# Altium PCB LEDCUBE.PcbDoc (part 1 of 2)
Units mm, origin at the board's own origin, x right, y up, seen from the top; angles counter-clockwise.
Board outline 150 x 150 mm, 2 copper layers (Top Layer, Bottom Layer); 119 components, 223 nets, 564 pads, 151 vias.
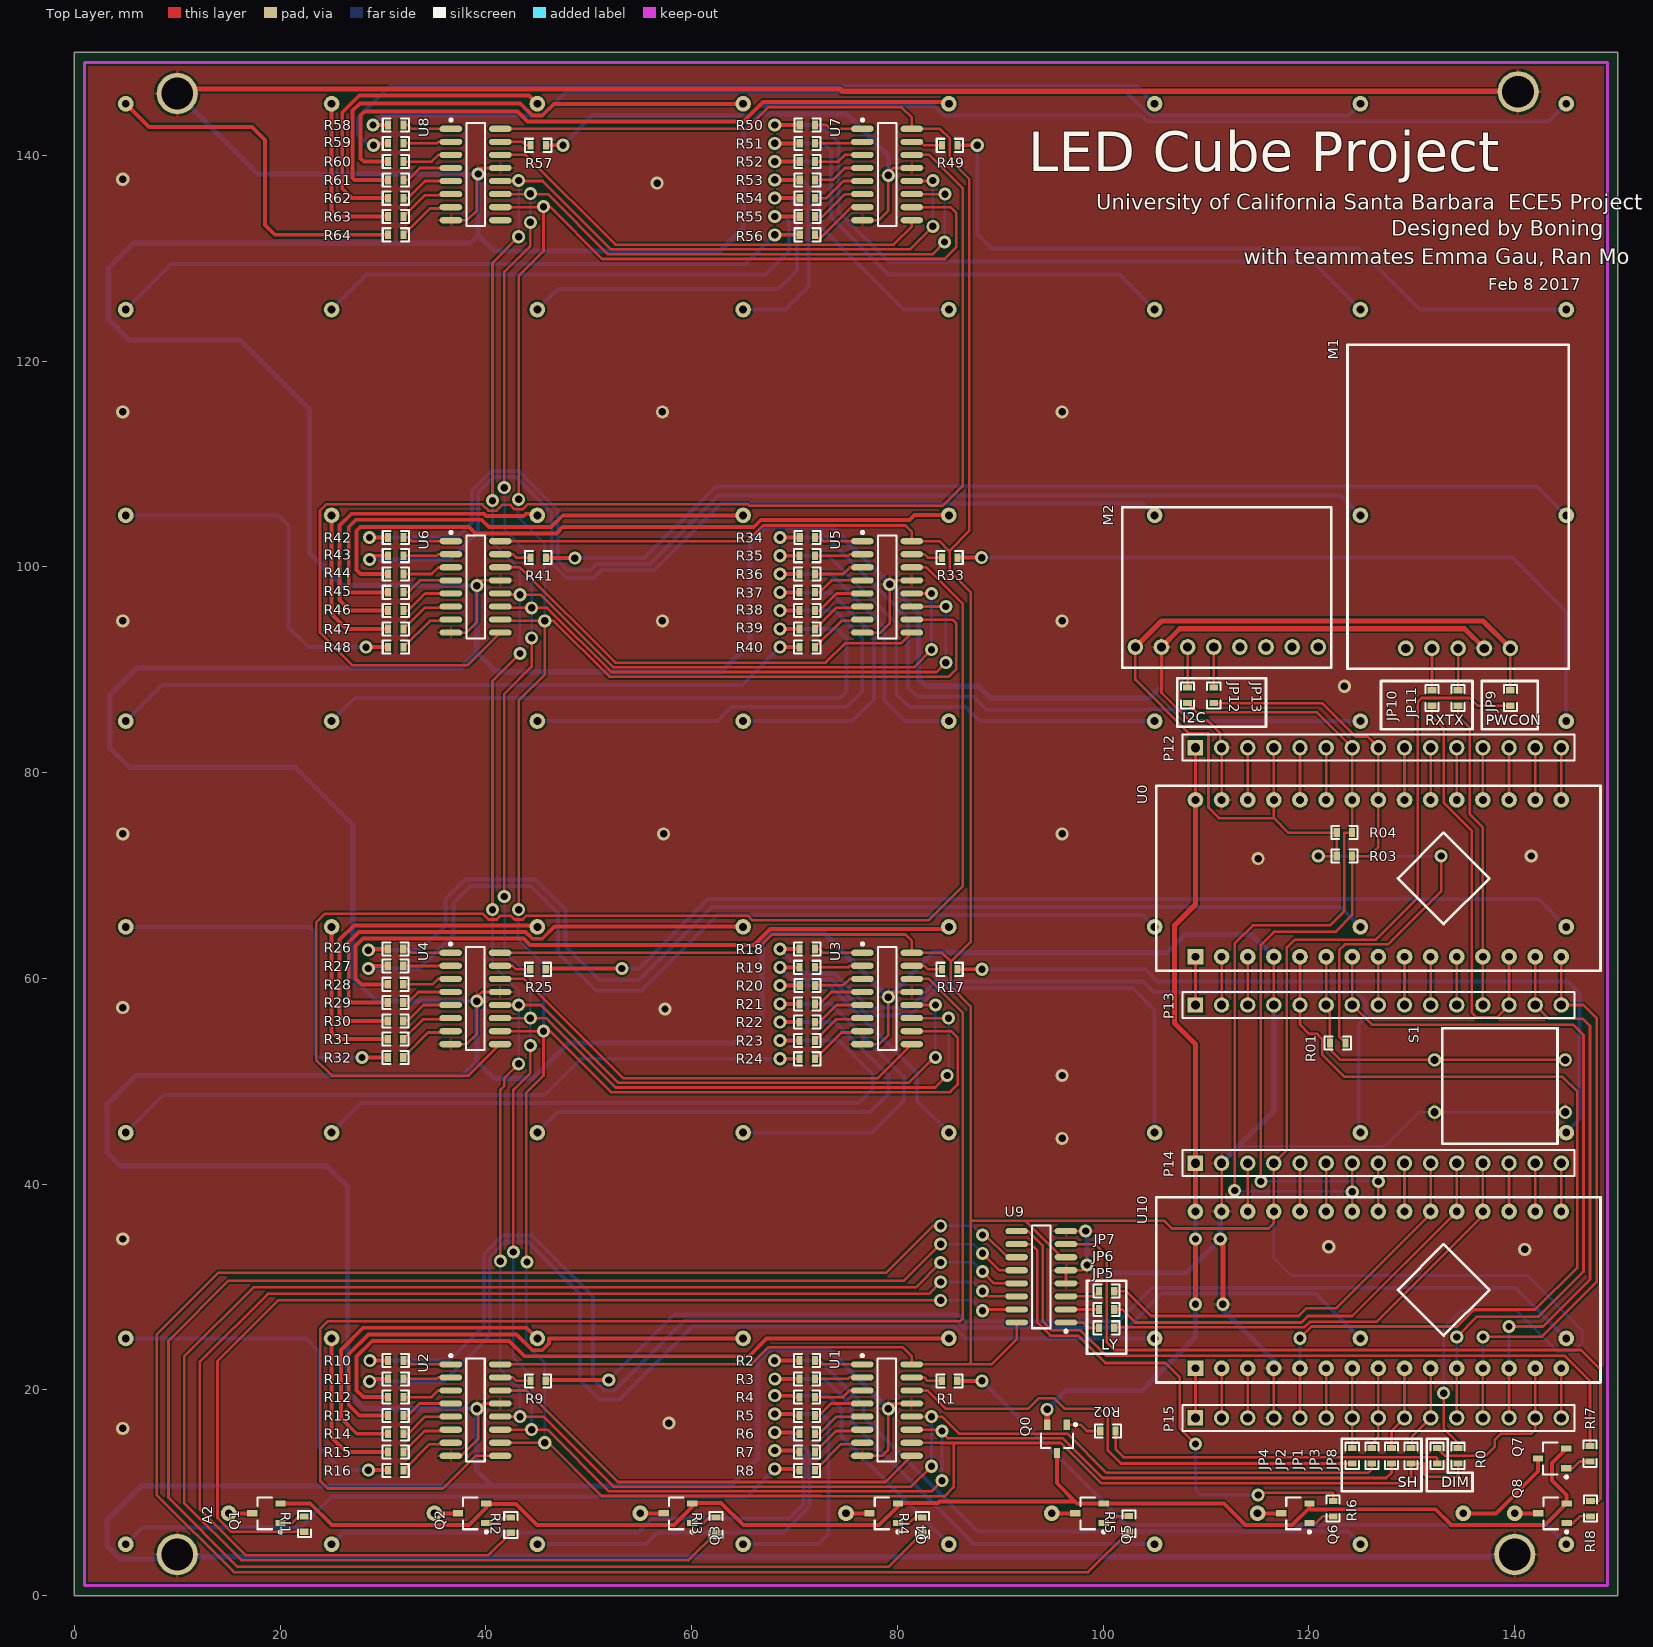
[diagram p0: Top Layer view]
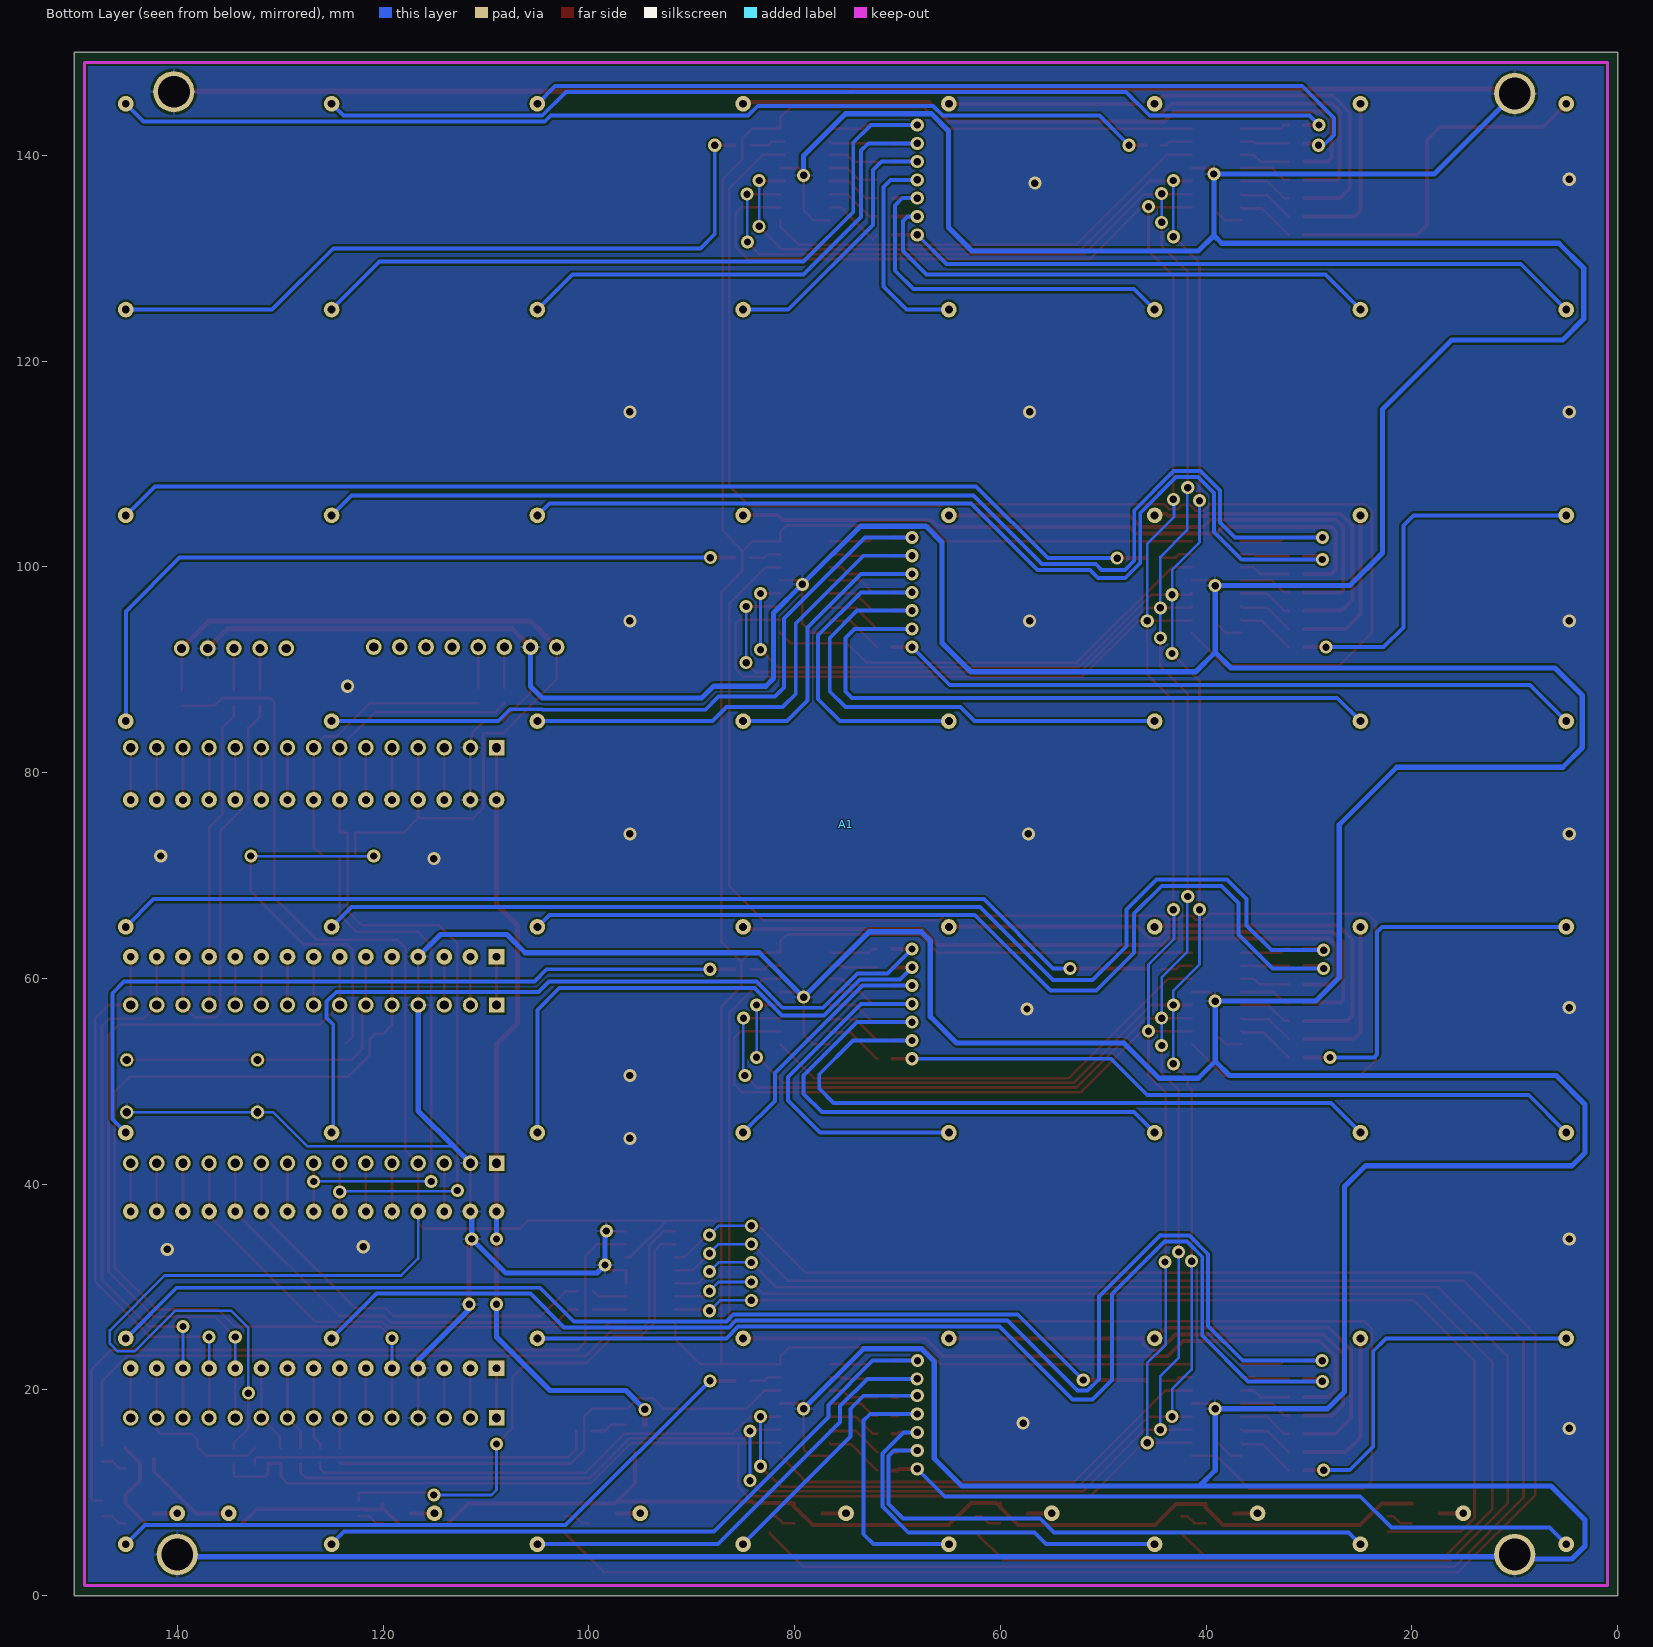
[diagram p1: Bottom Layer view, seen from below]

## Layer stack, top to bottom
Top Solder: solder mask 0.0102, Solder Resist, Dk 3.5
Top Layer: signal copper 0.0356
Dielectric 1: dielectric 0.32, FR-4, Dk 4.8
Bottom Layer: signal copper 0.0356
Bottom Solder: solder mask 0.0102, Solder Resist, Dk 3.5

## Board outline
0,0 150,0 150,150 0,150

## Design rules (kind name [scope] priority, off if disabled: settings)
Clearance [All] p1: gap=0.2
PolygonConnect [All] p1: connectstyle=Relief reliefconductorwidth=0.254 reliefentries=4 polygonreliefangle="90 Angle" airgapwidth=0.254
RoutingVias [All] p1: holewidth=0.6 width=1 viastyle="Through Hole" minholewidth=0.711 minwidth=1.27 maxholewidth=0.711 maxwidth=1.27
SolderMaskExpansion [All] p1: expansion=0.102
Width [All] p1: maxlimit=1 minlimit=0.254 preferedwidth=0.254
30 further rules are at their usual default settings.

## Components (designator, comment, footprint, x,y, rotation, side; value= is the part's Value field where it differs from the comment)
A1 "LED Cube Cathode Array" "LED C" 75,75 r90 bottom locked
A2 "LED Anode Array" "LED A" 77.5,8 r90 top locked
JP1 "0603" D0603 128.016,13.589 r90 top
JP2 "0603" D0603 126.111,13.589 r90 top
JP3 "0603" D0603 129.921,13.589 r90 top
JP4 "0603" D0603 124.206,13.589 r90 top
JP5 "0603" D0603 100.33,26.035 r0 top
JP6 "0603" D0603 100.33,27.813 r0 top
JP7 "0603" D0603 100.33,29.591 r0 top
JP8 "0603" D0603 132.461,13.589 r90 top
JP9 "0603" D0603 139.573,87.249 r270 top
JP10 "0603" D0603 131.953,87.249 r270 top
JP11 "0603" D0603 134.493,87.249 r270 top
JP12 "0603" D0603 108.204,87.503 r270 top
JP13 "0603" D0603 110.744,87.503 r270 top
M1 "GPS Module" "GPS Module" 145.243,90.075 r90 top
M2 "MPU 6050" MCU6050 101.864,90.202 r0 top
P12 "Header 15" HDR1X15 108.966,82.423 r0 top
P13 "Header 15" HDR1X15 108.966,57.404 r0 top
P14 "Header 15" HDR1X15 108.966,42.037 r0 top
P15 "Header 15" HDR1X15 108.966,17.272 r0 top
Q0 "AO3401" SOT23 95.504,15.24 r270 top
Q1 "AO3401" SOT23 18.669,8.001 r180 top
Q2 "AO3401" SOT23 38.669,8.001 r180 top
Q3 "AO3401" SOT23 58.669,8.001 r180 top
Q4 "AO3401" SOT23 78.669,8.001 r180 top
Q5 "AO3401" SOT23 98.669,8.001 r180 top
Q6 "AO3401" SOT23 118.669,8.001 r180 top
Q7 "AO3401" SOT23 143.637,13.335 r180 top
Q8 "AO3401" SOT23 143.669,8.001 r180 top
R0 "0603" D0603 134.493,13.589 r90 top
R1 "0603" D0603 85.064,20.876 r180 top
R01 "0603" D0603 122.797,53.721 r0 top
R2 "0603" D0603 71.221,22.844 r0 top
R02 "0603" D0603 100.457,16.002 r0 top
R3 "0603" D0603 71.221,21.066 r0 top
R03 "0603" D0603 123.444,71.882 r180 top
R4 "0603" D0603 71.221,19.288 r0 top
R04 "0603" D0603 123.444,74.168 r180 top
R5 "0603" D0603 71.221,17.51 r0 top
R6 "0603" D0603 71.221,15.732 r0 top
R7 "0603" D0603 71.221,13.954 r0 top
R8 "0603" D0603 71.221,12.176 r0 top
R9 "0603" D0603 45.072,20.876 r180 top
R10 "0603" D0603 31.229,22.844 r0 top
R11 "0603" D0603 31.229,21.066 r0 top
R12 "0603" D0603 31.229,19.288 r0 top
R13 "0603" D0603 31.229,17.51 r0 top
R14 "0603" D0603 31.229,15.732 r0 top
R15 "0603" D0603 31.229,13.954 r0 top
R16 "0603" D0603 31.229,12.176 r0 top
R17 "0603" D0603 85.077,60.881 r180 top
R18 "0603" D0603 71.234,62.849 r0 top
R19 "0603" D0603 71.234,61.071 r0 top
R20 "0603" D0603 71.259,59.309 r0 top
R21 "0603" D0603 71.234,57.515 r0 top
R22 "0603" D0603 71.234,55.737 r0 top
R23 "0603" D0603 71.234,53.959 r0 top
R24 "0603" D0603 71.234,52.181 r0 top
R25 "0603" D0603 45.059,60.881 r180 top
R26 "0603" D0603 31.216,62.849 r0 top
R27 "0603" D0603 31.216,61.198 r0 top
R28 "0603" D0603 31.216,59.42 r0 top
R29 "0603" D0603 31.216,57.642 r0 top
R30 "0603" D0603 31.216,55.864 r0 top
R31 "0603" D0603 31.216,54.086 r0 top
R32 "0603" D0603 31.216,52.308 r0 top
R33 "0603" D0603 85.077,100.886 r180 top
R34 "0603" D0603 71.247,102.854 r0 top
R35 "0603" D0603 71.234,101.076 r0 top
R36 "0603" D0603 71.234,99.298 r0 top
R37 "0603" D0603 71.234,97.52 r0 top
R38 "0603" D0603 71.234,95.742 r0 top
R39 "0603" D0603 71.234,93.964 r0 top
R40 "0603" D0603 71.234,92.186 r0 top
R41 "0603" D0603 45.085,100.886 r180 top
R42 "0603" D0603 31.242,102.854 r0 top
R43 "0603" D0603 31.242,101.076 r0 top
R44 "0603" D0603 31.242,99.298 r0 top
R45 "0603" D0603 31.242,97.52 r0 top
R46 "0603" D0603 31.242,95.742 r0 top
R47 "0603" D0603 31.242,93.964 r0 top
R48 "0603" D0603 31.242,92.186 r0 top
R49 "0603" D0603 85.09,140.97 r180 top
R50 "0603" D0603 71.247,142.938 r0 top
R51 "0603" D0603 71.247,141.16 r0 top
R52 "0603" D0603 71.247,139.382 r0 top
R53 "0603" D0603 71.247,137.604 r0 top
R54 "0603" D0603 71.247,135.826 r0 top
R55 "0603" D0603 71.247,134.048 r0 top
R56 "0603" D0603 71.247,132.27 r0 top
R57 "0603" D0603 45.085,140.97 r180 top
R58 "0603" D0603 31.242,142.938 r0 top
R59 "0603" D0603 31.242,141.16 r0 top
R60 "0603" D0603 31.242,139.382 r0 top
R61 "0603" D0603 31.242,137.604 r0 top
R62 "0603" D0603 31.242,135.826 r0 top
R63 "0603" D0603 31.242,134.048 r0 top
R64 "0603" D0603 31.242,132.27 r0 top
Rl1 "0603" D0603 22.352,6.956 r270 top
Rl2 "0603" D0603 42.418,6.858 r270 top
Rl3 "0603" D0603 62.357,6.858 r270 top
Rl4 "0603" D0603 82.423,6.858 r270 top
Rl5 "0603" D0603 102.489,6.985 r270 top
Rl6 "0603" D0603 122.352,8.456 r90 top
Rl7 "0603" D0603 147.32,13.79 r90 top
Rl8 "0603" D0603 147.352,8.456 r90 top
S1 "SW-PB" SW_B 138.557,49.53 r90 top
U0 "Arduino Nano" "Arduino nano" 126.746,69.723 r0 top locked
U1 "MC74HC595AD" 751B-05_N 78.981,18.034 r0 top
U2 "MC74HC595AD" 751B-05_N 38.989,18.034 r0 top
U3 "MC74HC595AD" 751B-05_N 78.994,58.039 r0 top
U4 "MC74HC595AD" 751B-05_N 38.976,58.039 r0 top
U5 "MC74HC595AD" 751B-05_N 78.994,98.044 r0 top
U6 "MC74HC595AD" 751B-05_N 39.002,98.044 r0 top
U7 "MC74HC595AD" 751B-05_N 78.994,138.128 r0 top
U8 "MC74HC595AD" 751B-05_N 39.002,138.128 r0 top
U9 "MC74HC138AD" 751B-05_N 93.98,30.988 r180 top
U10 "Arduino Nano" "ARDUINO NANO" 126.746,29.718 r0 top

## Footprints (in the part's own frame and the unit in brackets; to place one, negate y for a bottom-side part, rotate by r counter-clockwise, add the part's x,y. Pads: shape width x height; smd on the part's side, far side on the other; paste and mask are expansions set on the pad)
751B-05_N [mm] "SOIC, 16-Leads, Body 9.9x3.9mm, Pitch 1.27mm, IPC Medium Density"
  oval 2.2x0.6 smd: 1(-2.4,4.445) 2(-2.4,3.175) 3(-2.4,1.905) 4(-2.4,0.635) 5(-2.4,-0.635) 6(-2.4,-1.905) 7(-2.4,-3.175) 8(-2.4,-4.445) 9(2.4,-4.445) 10(2.4,-3.175) 11(2.4,-1.905) 12(2.4,-0.635) 13(2.4,0.635) 14(2.4,1.905) 15(2.4,3.175) 16(2.4,4.445)
  silkscreen extent -2.52,-5 0.9,5.42, body extent -2,-5 2,5, height 1.75
"Arduino nano" [mil] "arduino nano"
  rect 60x60 hole 30: 1(-700,-300)
  round 60 hole 30: 2(-600,-300) 3(-500,-300) 4(-400,-300) 5(-300,-300) 6(-200,-300) 7(-100,-300) 8(0,-300) 9(100,-300) 10(200,-300) 11(300,-300) 12(400,-300) 13(500,-300) 14(600,-300) 15(700,-300) 16(700,300) 17(600,300) 18(500,300) 19(400,300) 20(300,300) 21(200,300) 22(100,300) 23(0,300) 24(-100,300) 25(-200,300) 26(-300,300) 27(-400,300) 28(-500,300) 29(-600,300) 30(-700,300)
  silkscreen extent -850,-354 850,354
"ARDUINO NANO" [mil] "arduino nano"
  rect 60x60 hole 30: 1(-700,-300)
  round 60 hole 30: 2(-600,-300) 3(-500,-300) 4(-400,-300) 5(-300,-300) 6(-200,-300) 7(-100,-300) 8(0,-300) 9(100,-300) 10(200,-300) 11(300,-300) 12(400,-300) 13(500,-300) 14(600,-300) 15(700,-300) 16(700,300) 17(600,300) 18(500,300) 19(400,300) 20(300,300) 21(200,300) 22(100,300) 23(0,300) 24(-100,300) 25(-200,300) 26(-300,300) 27(-400,300) 28(-500,300) 29(-600,300) 30(-700,300)
  silkscreen extent -850,-354 850,354
D0603 [mm] "D0603"
  rect 0.6x0.85 smd: 1(-0.75,0) 2(0.75,0)
  silkscreen extent -1.27,-0.64 1.27,0.64, body extent -0.8,-0.4 0.8,0.4, height 0.5
"GPS Module" [mil] "Woops GPS Neo-6M"
  round 60 hole 35: 1(78.74,623.23) 2(78.74,523.23) 3(78.74,423.23) 4(78.74,323.23) 5(78.74,223.23)
  silkscreen extent 0,0 1240,846
HDR1X15 [mm] "Connector; Header; 15 Position"
  rect 1.5x1.5 hole 0.9: 1(0,0)
  round 1.5 hole 0.9: 2(2.54,0) 3(5.08,0) 4(7.62,0) 5(10.16,0) 6(12.7,0) 7(15.24,0) 8(17.78,0) 9(20.32,0) 10(22.86,0) 11(25.4,0) 12(27.94,0) 13(30.48,0) 14(33.02,0) 15(35.56,0)
  silkscreen extent -1.27,-1.27 36.83,1.27
"LED A" [mil] "LED ANODE ARRAY"
  round 60 hole 30: 1(0,2460.63) 2(0,1673.23) 3(0,885.83) 4(0,98.43) 5(0,-688.98) 6(0,-1476.38) 7(0,-2263.78) 8(0,-2460.63)
"LED C" [mil] "LED Cathode Array"
  round 60 hole 30: 1(-2755.91,2755.91) 2(-2755.91,1968.5) 3(-2755.91,1181.1) 4(-2755.91,393.7) 5(-2755.91,-393.7) 6(-2755.91,-1181.1) 7(-2755.91,-1968.5) 8(-2755.91,-2755.91) 9(-1968.5,2755.91) 10(-1968.5,1968.5) 11(-1968.5,1181.1) 12(-1968.5,393.7) 13(-1968.5,-393.7) 14(-1968.5,-1181.1) 15(-1968.5,-1968.5) 16(-1968.5,-2755.91) 17(-1181.1,2755.91) 18(-1181.1,1968.5) 19(-1181.1,1181.1) 20(-1181.1,393.7) 21(-1181.1,-393.7) 22(-1181.1,-1181.1) 23(-1181.1,-1968.5) 24(-1181.1,-2755.91) 25(-393.7,2755.91) 26(-393.7,1968.5) 27(-393.7,1181.1) 28(-393.7,393.7) 29(-393.7,-393.7) 30(-393.7,-1181.1) 31(-393.7,-1968.5) 32(-393.7,-2755.91) 33(393.7,2755.91) 34(393.7,1968.5) 35(393.7,1181.1) 36(393.7,393.7) 37(393.7,-393.7) 38(393.7,-1181.1) 39(393.7,-1968.5) 40(393.7,-2755.91) 41(1181.1,2755.91) 42(1181.1,1968.5) 43(1181.1,1181.1) 44(1181.1,393.7) 45(1181.1,-393.7) 46(1181.1,-1181.1) 47(1181.1,-1968.5) 48(1181.1,-2755.91) 49(1968.5,2755.91) 50(1968.5,1968.5) 51(1968.5,1181.1) 52(1968.5,393.7) 53(1968.5,-393.7) 54(1968.5,-1181.1) 55(1968.5,-1968.5) 56(1968.5,-2755.91) 57(2755.91,2755.91) 58(2755.91,1968.5) 59(2755.91,1181.1) 60(2755.91,393.7) 61(2755.91,-393.7) 62(2755.91,-1181.1) 63(2755.91,-1968.5) 64(2755.91,-2755.91)
MCU6050 [mil] "MCU6050"
  round 60 hole 35: 1(49.61,78.74) 2(149.61,78.74) 3(249.61,78.74) 4(349.61,78.74) 5(449.61,78.74) 6(549.61,78.74) 7(649.61,78.74) 8(749.61,78.74)
  silkscreen extent 0,0 799,614
SOT23 [mm] "SOT23, 3-Leads, Body 2.90x2.80mm, Pitch 0.95mm, IPC Medium Density"
  rect 1x0.6 smd: 1(-1.375,0.95) 2(1.375,0) 3(-1.375,-0.95)
  silkscreen extent -1.5,-1.55 0.87,1.93, body extent -0.88,-1.52 0.87,1.53, height 1.45
SW_B [mm]
  round 1.3 hole 0.8: 1(-2.54,6.35) 1(-2.54,-6.35) 2(2.54,6.35) 2(2.54,-6.35)
  silkscreen extent -5.6,-5.6 5.6,5.6

## Part data
A1: library part Cathode_Array
A2: library part "Header 8", "Header, 8-Pin"
JP1 JP2 JP3 JP4 JP5 JP6 JP7 JP8 JP9 JP10 JP11 JP12 JP13 R0 R1 R01 R2 R02 R3 R03 R4 R04 R5 R6 R7 R8 R9 R10 R11 R12 R13 R14 R15 R16 R17 R18 R19 R20 R21 R22 R23 R24 R25 R26 R27 R28 R29 R30 R31 R32 R33 R34 R35 R36 R37 R38 R39 R40 R41 R42 R43 R44 R45 R46 R47 R48 R49 R50 R51 R52 R53 R54 R55 R56 R57 R58 R59 R60 R61 R62 R63 R64 Rl1 Rl2 Rl3 Rl4 Rl5 Rl6 Rl7 Rl8: library part Res1, "Resistor"
M2: library part MPU6050
P12 P13 P14 P15: "Header, 15-Pin"
Q0 Q1 Q2 Q3 Q4 Q5 Q6 Q7 Q8: library part PMOS-2, "P-Channel Power MOSFET"
S1: "Switch"
U1 U2 U3 U4 U5 U6 U7 U8: "8-Bit Serial-Input/Serial or Prallel-Output Shift Register with Latched 3-State Outputs"
U9: "1-of-8 Decoder/Demultiplexer"

## Free pads (board coordinates)
  round 4 hole 3.1: 0(10,4) 0(10,146) 0(140,4) 0(140.335,146.177)

## Via types
v1: diameter 1.27, hole 0.711, Top Layer to Bottom Layer, tented both sides, 151 vias

## Nets (pads, with @x,y where several pads share a name; then routed paths per layer and width w, separated by ;. In a path a pad name is that pad's centre, name@x,y a point inside that pad or via, vN(x,y) a via of type N, cw(c..) or ccw(c..) an arc to the next point about the centre after c; other vN are vias at no path point)
5V: JP9.2 P14.4 R0.2 U1.16 U2.16 U3.16 U4.16 U5.16 U6.16 U7.16 U8.16 U9.6 U9.16 U10.27 | length 489.5
  Top Layer w0.254: U4.16@41.376,62.484 66.04,62.484 67.818,64.262 80.772,64.262 81.394,63.64 U3.16@81.394,62.484 84.328,62.484 85.2,61.612 ; U2.16@41.389,22.479 65.786,22.479 67.437,24.13 80.518,24.13 81.381,23.267 U1.16@81.381,22.479 87.122,22.479 ; U6.16@41.402,102.489 65.405,102.489 66.929,104.013 80.772,104.013 81.394,103.391 U5.16@81.394,102.489 84.074,102.489 84.963,101.6 ; U8.16@41.402,142.573 65.357,142.573 67.437,144.653 80.391,144.653 81.394,143.65 U7.16@81.394,142.573 84.122,142.573 85.09,141.605 85.09,139.573 86.995,137.668 86.995,103.505 85.09,101.6 84.963,101.6 ; U9.16@91.58,26.543 91.58,24.905 89.154,22.479 87.122,22.479 ; U9.6@96.38,32.893 95.963,32.893 92.407,36.449 ; v1(133.096,19.685) 133.096,16.256 134.493,14.859 R0.2@134.493,14.339 ; JP9.2@139.573,86.499 136.386,86.499 135.636,87.249 130.937,87.249 130.556,86.868 130.556,67.818 126.492,63.754 118.618,63.754 117.856,62.992 117.856,43.307 P14.4@116.586,42.037 U10.27@116.586,37.338 116.586,36.195 116.078,35.687 106.68,35.687 105.918,36.449 92.407,36.449 ; 84.963,101.6 85.09,101.473 85.09,99.568 87.122,97.536 87.122,63.534 85.2,61.612 ; 85.2,61.612 85.2,59.199 87.122,57.277 87.122,36.449 ; 87.122,22.479 87.122,36.449 ; 87.122,36.449 92.407,36.449
  Bottom Layer w0.254: U10.27@116.586,37.338 116.586,32.766 118.237,31.115 141.224,31.115 146.558,25.781 146.558,24.511 145.796,23.749 144.145,23.749 140.208,27.686 134.747,27.686 133.096,26.035 v1(133.096,19.685)
5V_0: JP9.1 M1.5 M2.1 P12.4 R01.2 R03.2 R04.2 U0.27 | length 123.4
  Top Layer w0.254: M2.1@103.124,92.202 103.124,89.027 108.331,83.82 110.236,83.82 110.236,76.581 111.252,75.565 116.586,75.565 ; P12.4@116.586,82.169 U0.27@116.586,77.343 116.586,75.565 ; v1(120.904,71.882) R03.2@122.694,71.882 R04.2@122.694,74.168 117.983,74.168 116.586,75.565 ; R01.2@123.547,53.721 122.936,54.332 122.936,62.738 123.498,63.3 127.689,63.3 132.842,68.453 v1(132.842,71.882) ; JP9.1@139.573,87.999 M1.5@139.573,92.075
  Top Layer w0.508: M2.1@103.124,92.202 105.664,94.742 136.906,94.742 M1.5@139.573,92.075
  Bottom Layer w0.254: v1(120.904,71.882) v1(132.842,71.882)
A0: JP5.2 P14.12 U10.19 | length 45.4
  Top Layer w0.254: JP5.2@101.08,26.035 101.134,26.089 119.554,26.089 120.081,26.616 126.565,26.616 136.906,36.957 U10.19@136.906,37.338 P14.12@136.906,42.037
A1: JP6.2 P14.11 U10.20 | length 43
  Top Layer w0.254: JP6.2@101.08,27.813 101.854,27.813 103.124,26.543 119.253,26.543 119.888,27.178 124.206,27.178 U10.20@134.366,37.338 P14.11@134.366,42.037
A2: JP7.2 P14.10 U10.21 | length 40.8
  Top Layer w0.254: JP7.2@101.08,29.591 102.235,29.591 104.648,27.178 118.999,27.178 119.761,27.94 122.682,27.94 131.826,37.084 U10.21@131.826,37.338 P14.10@131.826,42.037
D01: A1.1 R1.1 | length 65.8
  Top Layer w0.381: R1.1@85.814,20.876 v1(88.217,20.876)
  Bottom Layer w0.381: v1(88.217,20.876) 102.246,6.847 143.152,6.847 A1.1@145,5
D02: A1.2 R2.1 | length 67.5
  Top Layer w0.381: v1(68.056,22.844) R2.1@70.471,22.844
  Bottom Layer w0.381: v1(68.056,22.844) 72.406,22.844 76.708,18.542 76.708,17.346 87.831,6.223 123.777,6.223 A1.2@125,5
D03: A1.3 R3.1 | length 46.8
  Top Layer w0.381: v1(68.088,21.066) R3.1@70.471,21.066
  Bottom Layer w0.381: v1(68.088,21.066) 72.914,21.066 75.565,18.415 75.565,16.891 87.456,5 A1.3@105,5
D04: A1.4 R4.1 | length 27
  Top Layer w0.381: v1(68.072,19.431) 69.838,19.431 69.981,19.288 R4.1@70.471,19.288
  Bottom Layer w0.381: v1(68.072,19.431) 73.279,19.431 74.549,18.161 74.549,15.451 A1.4@85,5
D05: A1.5 R5.1 | length 27.7
  Top Layer w0.381: v1(68.072,17.653) 69.838,17.653 69.981,17.51 R5.1@70.471,17.51
  Bottom Layer w0.381: A1.5@65,5 72.31,5 73.279,5.969 73.279,17.018 72.644,17.653 v1(68.072,17.653)
D06: A1.6 R6.1 | length 39.8
  Top Layer w0.381: v1(68.072,15.875) 69.838,15.875 69.981,15.732 R6.1@70.471,15.732
  Bottom Layer w0.381: A1.6@45,5 55.546,5 56.698,6.152 68.95,6.152 71.447,8.649 71.447,13.83 69.402,15.875 v1(68.072,15.875)
D07: A1.7 R7.1 | length 57.6
  Top Layer w0.381: v1(68.072,14.097) 69.838,14.097 69.981,13.954 R7.1@70.471,13.954
  Bottom Layer w0.381: A1.7@25,5 26.152,6.152 54.782,6.152 56.123,7.493 69.469,7.493 70.866,8.89 70.866,13.589 70.358,14.097 v1(68.072,14.097)
D08: A1.8 R8.1 | length 68.6
  Top Layer w0.381: v1(68.072,12.319) 69.838,12.319 69.981,12.176 R8.1@70.471,12.176
  Bottom Layer w0.381: A1.8@5,5 6.604,6.604 21.971,6.604 25.019,9.652 65.405,9.652 v1(68.072,12.319)
D09: A1.9 R9.1 | length 105.5
  Top Layer w0.381: R9.1@45.822,20.876 45.901,20.955 v1(51.943,20.955)
  Bottom Layer w0.381: v1(51.943,20.955) 58.302,27.314 85.959,27.314 86.613,26.661 101.464,26.661 104.73,29.927 140.072,29.927 A1.9@145,25
D10: A1.10 R10.1 | length 124.4
  Top Layer w0.381: v1(28.718,22.844) R10.1@30.479,22.844
  Bottom Layer w0.381: v1(28.718,22.844) 36.433,22.844 39.796,26.207 39.796,33.177 41.626,35.007 44.405,35.007 44.45,35.052 50.419,29.083 50.419,21.029 51.518,19.93 52.505,19.93 59.309,26.733 85.718,26.733 86.372,26.08 102.407,26.08 105.673,29.346 120.653,29.346 A1.10@125,25
D11: A1.11 R11.1 | length 103
  Top Layer w0.381: v1(28.702,20.828) 28.94,21.066 R11.1@30.479,21.066
  Bottom Layer w0.381: v1(28.702,20.828) 35.941,20.828 40.377,25.264 40.377,32.937 41.866,34.426 44.06,34.426 49.149,29.337 49.149,20.955 51.054,19.05 52.969,19.05 60.071,26.152 85.477,26.152 86.63,25 A1.11@105,25
D12: A1.12 R12.1 | length 66.2
  Top Layer w0.381: R12.1@30.479,19.288 28.083,19.288 27.432,19.939 27.432,23.241 28.956,24.765 42.239,24.765 43.738,23.266 65.557,23.266 67.291,25 A1.12@85,25
D13: A1.13 R13.1 | length 49.7
  Top Layer w0.381: R13.1@30.479,17.51 30.463,17.526 27.686,17.526 26.67,18.542 26.67,23.495 28.575,25.4 42.97,25.4 44.523,23.847 45.477,23.847 46.152,24.523 46.152,25 A1.13@65,25
D14: A1.14 R14.1 | length 32.2
  Top Layer w0.381: R14.1@30.479,15.732 27.448,15.732 25.908,17.272 25.908,23.876 28.067,26.035 43.965,26.035 A1.14@45,25
D15: A1.15 R15.1 | length 15.7
  Top Layer w0.381: A1.15@25,25 25,15.386 26.432,13.954 R15.1@30.479,13.954
D16: A1.16 R16.1 | length 36.2
  Top Layer w0.381: v1(28.575,12.192) 30.463,12.192 R16.1@30.479,12.176
  Bottom Layer w0.381: A1.16@5,25 22.498,25 23.749,23.749 23.749,14.478 26.035,12.192 v1(28.575,12.192)
D17: A1.17 R17.1 | length 75.5
  Top Layer w0.381: R17.1@85.827,60.881 v1(88.217,60.881)
  Bottom Layer w0.381: v1(88.217,60.881) 104.092,60.881 105.283,59.69 145.161,59.69 146.304,58.547 146.304,46.304 A1.17@145,45
D18: A1.18 R18.1 | length 76.1
  Top Layer w0.381: v1(68.58,62.849) R18.1@70.484,62.849
  Bottom Layer w0.381: v1(68.58,62.849) 70.958,60.471 73.887,60.471 77.218,57.141 81.158,57.141 83.707,59.69 103.886,59.69 104.902,58.674 124.549,58.674 125.476,57.747 125.476,56.134 124.841,55.499 124.841,45.159 A1.18@125,45
D19: A1.19 R19.1 | length 54.2
  Top Layer w0.381: v1(68.58,61.071) R19.1@70.484,61.071
  Bottom Layer w0.381: v1(68.58,61.071) 69.761,59.89 73.647,59.89 77.149,56.388 81.227,56.388 83.894,59.055 102.87,59.055 105,56.925 A1.19@105,45
D20: A1.20 R20.1 | length 25.9
  Top Layer w0.381: v1(68.58,59.309) R20.1@70.509,59.309
  Bottom Layer w0.381: v1(68.58,59.309) 73.406,59.309 81.915,50.8 81.915,48.085 A1.20@85,45
D21: A1.21 R21.1 | length 36.1
  Top Layer w0.381: v1(68.58,57.515) R21.1@70.484,57.515
  Bottom Layer w0.381: A1.21@65,45 77.512,45 80.645,48.133 80.645,50.419 73.549,57.515 v1(68.58,57.515)
D22: A1.22 R22.1 | length 52.1
  Top Layer w0.381: v1(68.58,55.737) R22.1@70.484,55.737
  Bottom Layer w0.381: A1.22@45,45 46.99,46.99 77.343,46.99 79.121,48.768 79.121,50.546 73.93,55.737 v1(68.58,55.737)
D23: A1.23 R23.1 | length 68
  Top Layer w0.381: v1(68.58,53.959) R23.1@70.484,53.959
  Bottom Layer w0.381: A1.23@25,45 27.879,47.879 76.2,47.879 77.597,49.276 77.597,50.673 74.311,53.959 v1(68.58,53.959)
D24: A1.24 R24.1 | length 68.5
  Top Layer w0.381: v1(68.58,52.181) R24.1@70.484,52.181
  Bottom Layer w0.381: A1.24@5,45 8.641,48.641 45.72,48.641 49.26,52.181 v1(68.58,52.181)
D25: A1.25 R25.1 | length 103.1
  Top Layer w0.381: R25.1@45.809,60.881 45.888,60.96 v1(53.213,60.96)
  Bottom Layer w0.381: v1(53.213,60.96) 54.864,60.96 61.595,67.691 142.309,67.691 A1.25@145,65
D26: A1.26 R26.1 | length 112.6
  Top Layer w0.381: v1(28.575,62.738) 28.686,62.849 R26.1@30.466,62.849
  Bottom Layer w0.381: v1(28.575,62.738) 33.655,62.738 36.068,65.151 36.068,67.691 37.973,69.596 44.831,69.596 47.752,66.675 47.752,63.119 51.054,59.817 54.864,59.817 61.976,66.929 123.071,66.929 A1.26@125,65
D27: A1.27 R27.1 | length 93.5
  Top Layer w0.381: v1(28.575,60.96) 28.813,61.198 R27.1@30.466,61.198
  Bottom Layer w0.381: v1(28.575,60.96) 33.528,60.96 36.83,64.262 36.83,67.31 38.49,68.97 44.314,68.97 46.99,66.294 46.99,62.484 50.673,58.801 55.118,58.801 62.484,66.167 103.833,66.167 A1.27@105,65
D28: A1.28 R28.1 | length 65.5
  Top Layer w0.381: R28.1@30.466,59.42 27.902,59.42 27.32,60.002 27.32,63.134 28.067,63.881 43.667,63.881 44.302,63.246 66.07,63.246 67.604,64.779 84.779,64.779 A1.28@85,65
D29: A1.29 R29.1 | length 49
  Top Layer w0.381: R29.1@30.466,57.642 26.94,57.642 26.67,57.912 26.67,63.53 27.656,64.516 43.854,64.516 44.523,63.847 45.477,63.847 46.654,65.024 64.976,65.024 A1.29@65,65
D30: A1.30 R30.1 | length 32.1
  Top Layer w0.381: R30.1@30.466,55.864 26.305,55.864 25.781,56.388 25.781,63.754 27.178,65.151 44.849,65.151 A1.30@45,65
D31: A1.31 R31.1 | length 16
  Top Layer w0.381: A1.31@25,65 25,54.756 25.67,54.086 R31.1@30.466,54.086
D32: A1.32 R32.1 | length 37.7
  Top Layer w0.381: v1(27.956,52.308) R32.1@30.466,52.308
  Bottom Layer w0.381: A1.32@5,65 22.884,65 23.368,64.516 23.368,52.578 23.638,52.308 v1(27.956,52.308)
D33: A1.33 R33.1 | length 72
  Top Layer w0.381: R33.1@85.827,100.886 v1(88.186,100.886)
  Bottom Layer w0.381: v1(88.186,100.886) 139.779,100.886 145,95.665 A1.33@145,85
D34: A1.34 R34.1 | length 69.7
  Top Layer w0.381: v1(68.58,102.854) R34.1@70.497,102.854
  Bottom Layer w0.381: v1(68.58,102.854) 73.152,102.854 81.026,94.98 81.026,88.265 81.915,87.376 87.376,87.376 88.646,86.106 104.476,86.106 104.523,86.152 107.65,86.152 108.802,85 A1.34@125,85
D35: A1.35 R35.1 | length 49
  Top Layer w0.381: v1(68.58,101.076) R35.1@70.484,101.076
  Bottom Layer w0.381: v1(68.58,101.076) 73.295,101.076 79.883,94.488 79.883,87.63 81.153,86.36 86.614,86.36 87.974,85 A1.35@105,85
D36: A1.36 R36.1 | length 28.4
  Top Layer w0.381: v1(68.58,99.298) R36.1@70.484,99.298
  Bottom Layer w0.381: v1(68.58,99.298) 73.549,99.298 78.74,94.107 78.74,86.995 80.735,85 A1.36@85,85
D37: A1.37 R37.1 | length 32.6
  Top Layer w0.381: v1(68.58,97.52) R37.1@70.484,97.52
  Bottom Layer w0.381: A1.37@65,85 75.602,85 77.724,87.122 77.724,93.345 73.549,97.52 v1(68.58,97.52)
D38: A1.38 R38.1 | length 49
  Top Layer w0.381: v1(68.58,95.742) R38.1@70.484,95.742
  Bottom Layer w0.381: A1.38@45,85 62.521,85 63.881,86.36 75.057,86.36 76.581,87.884 76.581,93.091 73.93,95.742 v1(68.58,95.742)
D39: A1.39 R39.1 | length 65.2
  Top Layer w0.381: v1(68.58,93.964) R39.1@70.484,93.964
  Bottom Layer w0.381: A1.39@25,85 27.249,87.249 74.422,87.249 75.057,87.884 75.057,93.091 74.184,93.964 v1(68.58,93.964)
D40: A1.40 R40.1 | length 68.5
  Top Layer w0.381: v1(68.58,92.186) R40.1@70.484,92.186
  Bottom Layer w0.381: A1.40@5,85 8.519,88.519 64.913,88.519 v1(68.58,92.186)
D41: A1.41 R41.1 | length 103.5
  Top Layer w0.381: R41.1@45.835,100.886 45.883,100.838 v1(48.641,100.838)
  Bottom Layer w0.381: v1@48.387,100.838 v1(48.641,100.838) 55.372,100.838 62.357,107.823 142.177,107.823 A1.41@145,105
D42: A1.42 R42.1 | length 113.2
  Top Layer w0.381: v1(28.686,102.854) R42.1@30.492,102.854
  Bottom Layer w0.381: v1(28.686,102.854) 37.195,102.854 38.662,104.321 38.662,107.429 40.536,109.302 43.149,109.302 46.982,105.47 46.982,100.592 47.879,99.695 50.165,99.695 50.727,100.257 55.934,100.257 62.611,106.934 123.066,106.934 A1.42@125,105
D43: A1.43 R43.1 | length 94.2
  Top Layer w0.381: v1(28.702,100.711) 29.067,101.076 R43.1@30.492,101.076
  Bottom Layer w0.381: v1(28.702,100.711) 36.576,100.711 39.243,103.378 39.243,107.188 40.776,108.721 42.908,108.721 46.401,105.229 46.401,100.351 47.856,98.897 50.51,98.897 51.289,99.676 56.369,99.676 62.865,106.172 103.828,106.172 A1.43@105,105
D44: A1.44 R44.1 | length 65.8
  Top Layer w0.381: R44.1@30.492,99.298 27.829,99.298 27.432,99.695 27.432,103.505 27.813,103.886 38.354,103.886 38.989,103.251 46.863,103.251 47.459,103.847 66.032,103.847 66.715,104.53 81.162,104.53 81.661,105.029 84.971,105.029 A1.44@85,105
D45: A1.45 R45.1 | length 49.5
  Top Layer w0.381: R45.1@30.492,97.52 26.813,97.52 26.67,97.663 26.67,103.886 27.359,104.575 39.57,104.575 40.298,103.847 46.316,103.847 47.469,105 A1.45@65,105
D46: A1.46 R46.1 | length 32.3
  Top Layer w0.381: R46.1@30.492,95.742 26.813,95.742 25.781,96.774 25.781,104.013 26.924,105.156 39.818,105.156 40.027,104.947 43.666,104.947 43.875,105.156 44.844,105.156 A1.46@45,105
D47: A1.47 R47.1 | length 15.7
  Top Layer w0.381: A1.47@25,105 25,95.396 26.432,93.964 R47.1@30.492,93.964
D48: A1.48 R48.1 | length 36.6
  Top Layer w0.381: v1(28.337,92.186) R48.1@30.492,92.186
  Bottom Layer w0.381: A1.48@5,105 19.841,105 20.828,104.013 20.828,94.107 22.749,92.186 v1(28.337,92.186)
D49: A1.49 R49.1 | length 70.8
  Top Layer w0.381: R49.1@85.84,140.97 v1(87.757,140.97)
  Bottom Layer w0.381: v1(87.757,140.97) 87.757,132.334 89.154,130.937 124.841,130.937 130.778,125 A1.49@145,125
D50: A1.50 R50.1 | length 70.7
  Top Layer w0.381: v1(68.072,142.938) R50.1@70.497,142.938
  Bottom Layer w0.381: v1(68.072,142.938) 72.581,142.938 74.295,141.224 74.295,134.493 79.121,129.667 120.333,129.667 A1.50@125,125
D51: A1.51 R51.1 | length 49.8
  Top Layer w0.381: v1(68.072,141.16) R51.1@70.497,141.16
  Bottom Layer w0.381: v1(68.072,141.16) 72.835,141.16 73.533,140.462 73.533,133.985 79.121,128.397 101.603,128.397 A1.51@105,125
D52: A1.52 R52.1 | length 28.4
  Top Layer w0.381: v1(68.072,139.382) R52.1@70.497,139.382
  Bottom Layer w0.381: v1(68.072,139.382) 71.565,139.382 72.39,138.557 72.39,133.223 80.613,125 A1.52@85,125
D53: A1.53 R53.1 | length 23
  Top Layer w0.381: v1(68.072,137.604) R53.1@70.497,137.604
  Bottom Layer w0.381: A1.53@65,125 69.12,125 71.374,127.254 71.374,136.906 70.676,137.604 v1(68.072,137.604)
D54: A1.54 R54.1 | length 38
  Top Layer w0.381: v1(68.072,135.826) R54.1@70.497,135.826
  Bottom Layer w0.381: A1.54@45,125 47,127 68.453,127 70.231,128.778 70.231,135.128 69.533,135.826 v1(68.072,135.826)
D55: A1.55 R55.1 | length 53.8
  Top Layer w0.381: v1(68.072,134.048) R55.1@70.497,134.048
  Bottom Layer w0.381: A1.55@25,125 28.397,128.397 67.183,128.397 69.469,130.683 69.469,133.604 69.025,134.048 v1(68.072,134.048)
D56: A1.56 R56.1 | length 68.5
  Top Layer w0.381: v1(68.072,132.27) R56.1@70.497,132.27
  Bottom Layer w0.381: A1.56@5,125 9.413,129.413 65.215,129.413 v1(68.072,132.27)
D57: A1.57 R57.1 | length 102.1
  Top Layer w0.381: R57.1@45.835,140.97 v1(47.498,140.97)
  Bottom Layer w0.381: v1(47.498,140.97) 50.375,143.847 65.593,143.847 66.535,144.789 83.581,144.789 84.523,143.847 103.701,143.847 104.282,143.266 143.266,143.266 A1.57@145,145
D58: A1.58 R58.1 | length 100.2
  Top Layer w0.381: v1(29.02,142.938) R58.1@30.492,142.938
  Bottom Layer w0.381: v1(29.02,142.938) 29.929,143.847 45.477,143.847 47.782,146.152 102.218,146.152 104.523,143.847 123.847,143.847 A1.58@125,145
D59: A1.59 R59.1 | length 84.5
  Top Layer w0.381: v1(29.083,140.97) 29.273,141.16 R59.1@30.492,141.16
  Bottom Layer w0.381: v1(29.083,140.97) 28.575,140.97 27.559,141.986 27.559,143.637 30.655,146.733 103.266,146.733 A1.59@105,145
D60: A1.60 R60.1 | length 65.7
  Top Layer w0.381: R60.1@30.492,139.382 28.131,139.382 27.813,139.7 27.813,143.891 28.194,144.272 43.053,144.272 44.059,143.266 65.034,143.266 66.938,145.17 84.644,145.17 84.907,144.907 A1.60@85,145
D61: A1.61 R61.1 | length 49.3
  Top Layer w0.381: R61.1@30.492,137.604 27.242,137.604 27.051,137.795 27.051,144.339 27.746,145.034 43.336,145.034 44.523,143.847 45.477,143.847 46.63,145 A1.61@65,145
D62: A1.62 R62.1 | length 32.2
  Top Layer w0.381: R62.1@30.492,135.826 26.988,135.826 26.035,136.779 26.035,144.145 27.686,145.796 44.204,145.796 A1.62@45,145
D63: A1.63 R63.1 | length 16.1
  Top Layer w0.381: A1.63@25,145 25,134.639 25.591,134.048 R63.1@30.492,134.048
D64: A1.64 R64.1 | length 35.6
  Top Layer w0.381: A1.64@5,145 7.252,142.748 17.272,142.748 18.542,141.478 18.542,133.223 19.495,132.27 R64.1@30.492,132.27
D_RX: P13.15 P15.12 U0.15 U10.12 | length 55.1
  Top Layer w0.254: P15.12@136.906,17.272 U10.12@136.906,22.098 ; v1(136.906,25.146) 142.621,25.146 147.955,30.48 147.955,56.134 146.685,57.404 P13.15@144.526,57.404 U0.15@144.526,62.103
  Bottom Layer w0.254: U10.12@136.906,22.098 v1@136.906,24.765
D_STATUS: P13.7 P15.11 U0.7 U10.11 | length 74.2
  Top Layer w0.254: U0.7@124.206,62.103 P13.7@124.206,57.404 126.111,55.499 145.669,55.499 146.685,54.483 146.685,31.496 142.313,27.124 136.344,27.124 v1(134.366,25.146) ; P15.11@134.366,17.272 U10.11@134.366,22.098
  Bottom Layer w0.254: U10.11@134.366,22.098 v1(134.366,25.146)
D_TX: P13.14 P15.13 U0.14 U10.13 | length 54.2
  Top Layer w0.254: P15.13@139.446,17.272 U10.13@139.446,22.098 ; v1(139.446,26.162) 142.748,26.162 147.32,30.734 147.32,55.372 146.621,56.07 143.32,56.07 P13.14@141.986,57.404 U0.14@141.986,62.103
  Bottom Layer w0.254: U10.13@139.446,22.098 v1(139.446,26.162)
DIM_PWM: JP8.2 P15.14 U10.14 | length 17.2
  Top Layer w0.254: JP8.2@132.461,14.339 133.211,13.589 137.172,13.589 138.049,14.466 138.049,15.113 138.684,15.748 141.605,15.748 141.986,16.129 P15.14@141.986,17.272 U10.14@141.986,22.098